# Altium PCB Elreg_Sender.PcbDoc (part 1 of 2)
Units mil, origin at the board's own origin, x right, y up, seen from the top; angles counter-clockwise.
Board outline 5250 x 7100 mil, 4 copper layers (Top Layer, Internal Plane 1, Internal Plane 2, Bottom Layer), stack 61.634 mil thick; 174 components, 129 nets, 539 pads, 126 vias.
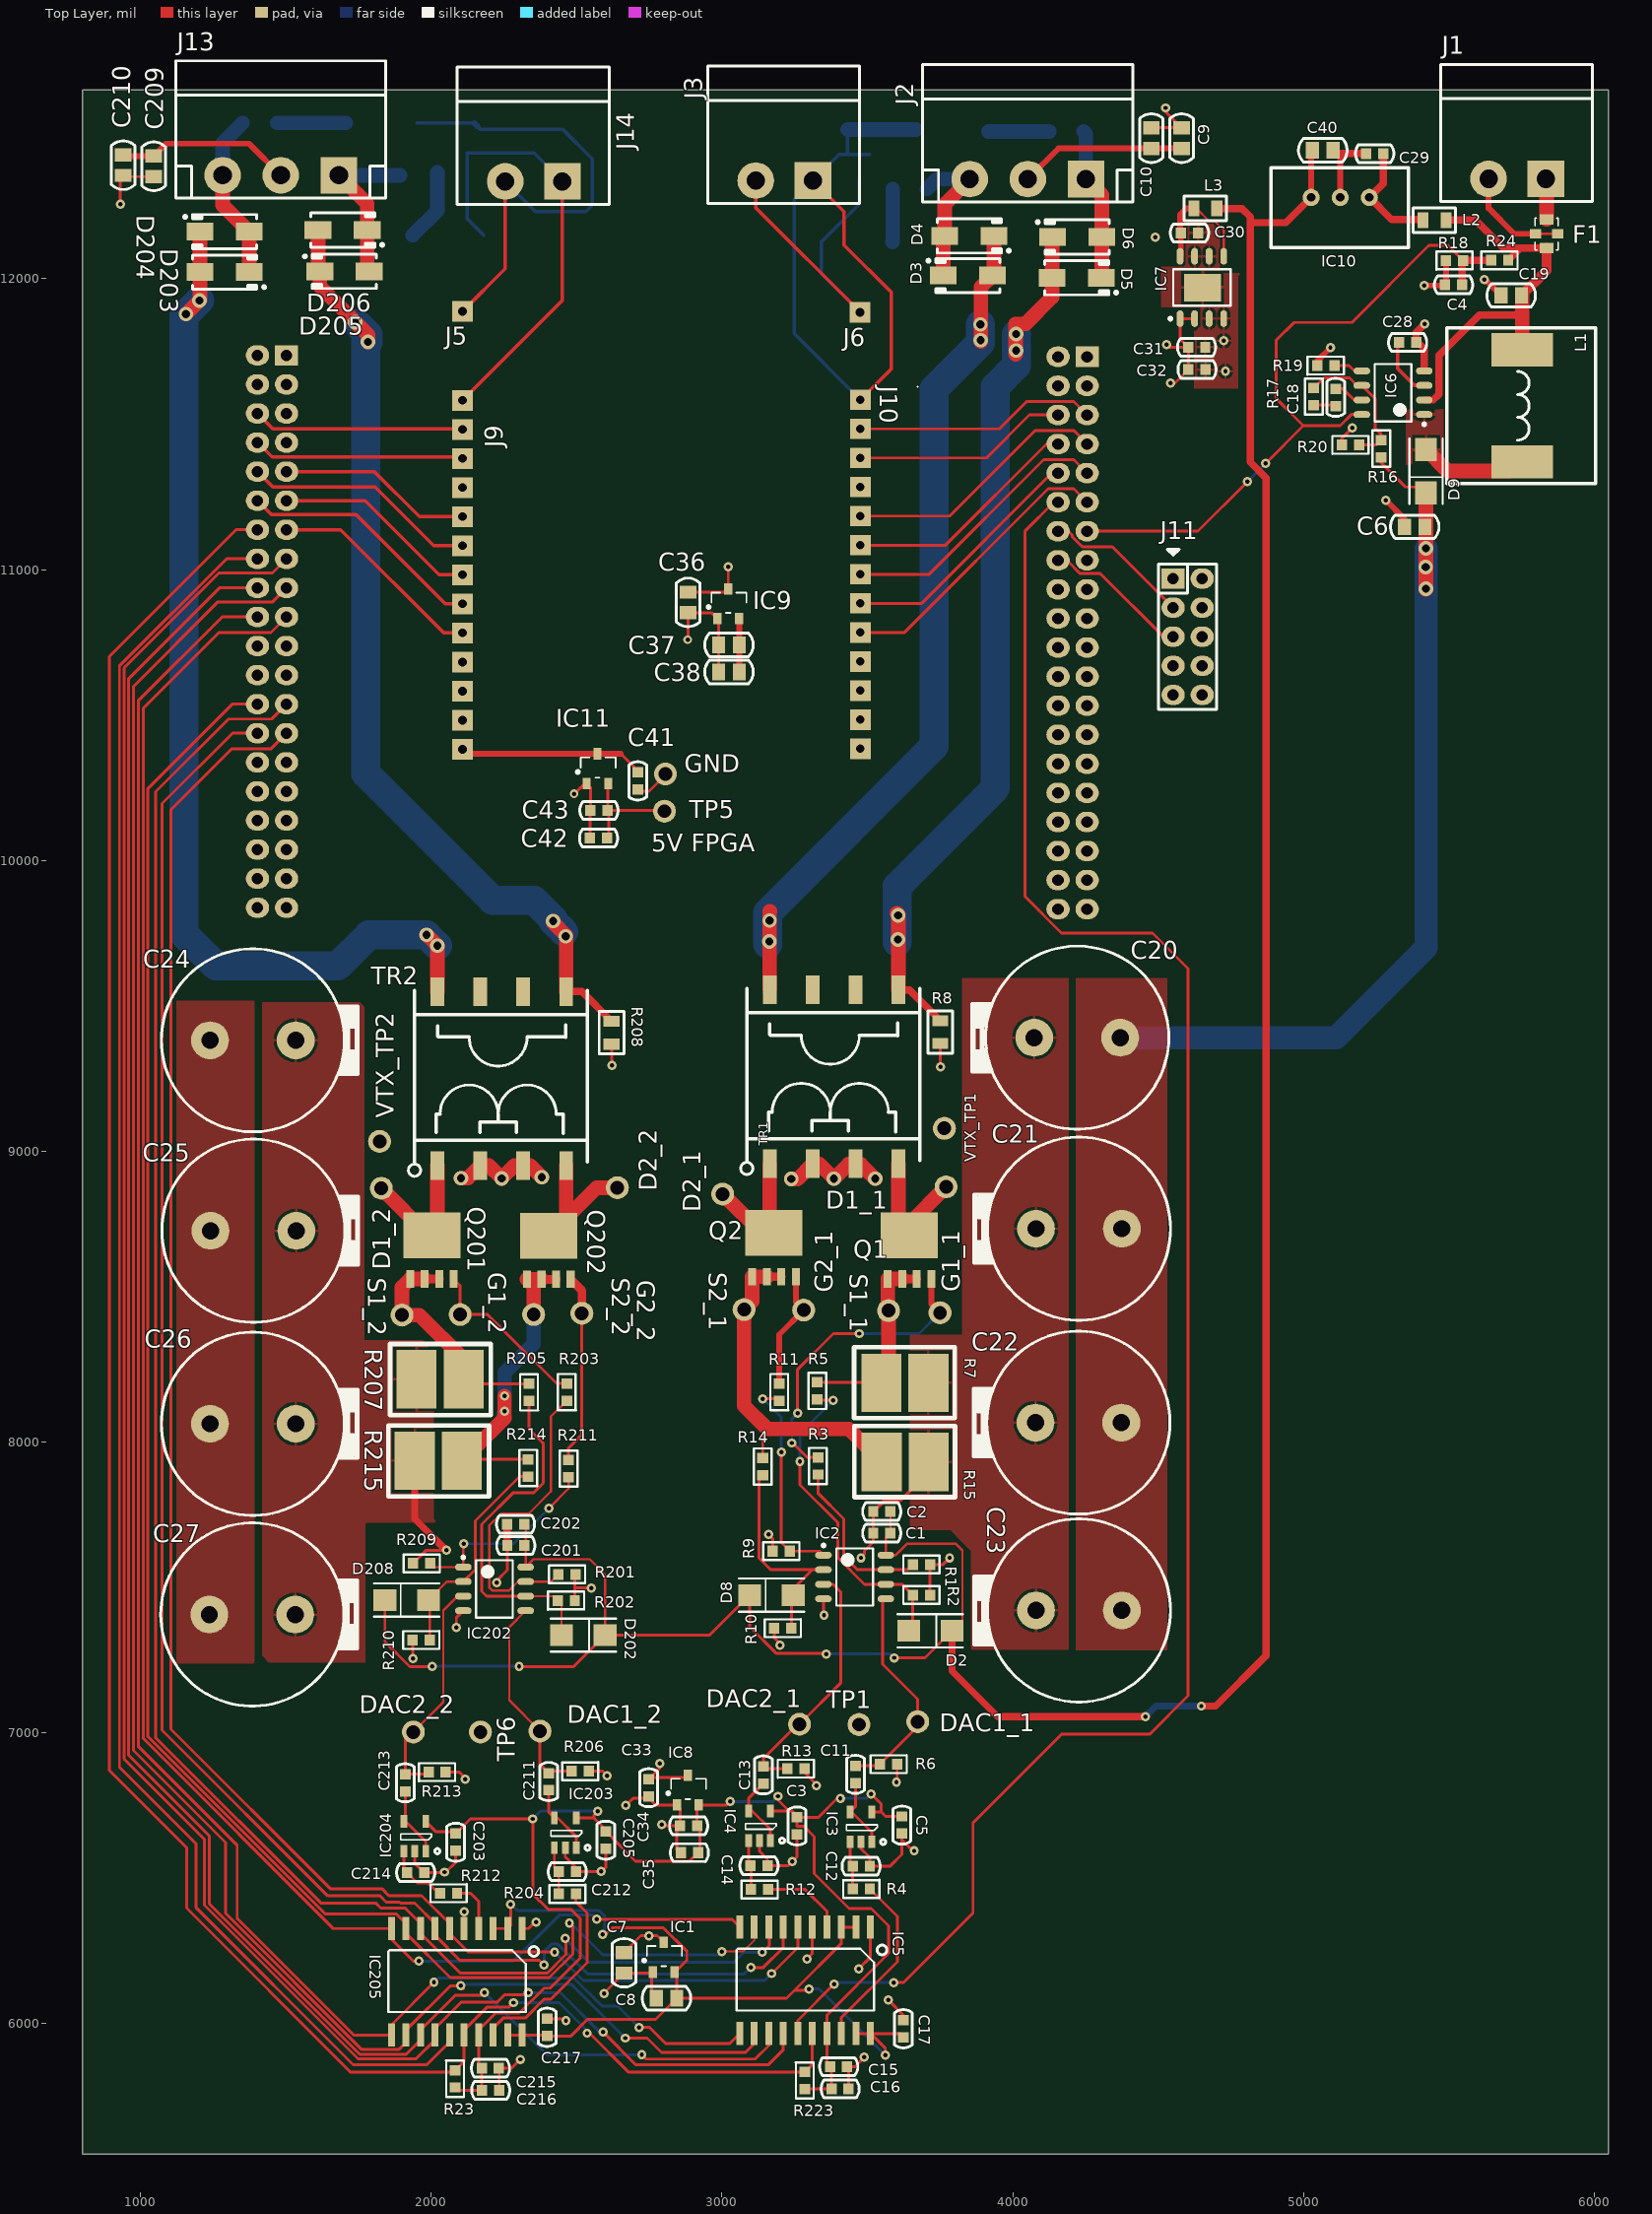
[diagram p0: Top Layer view]
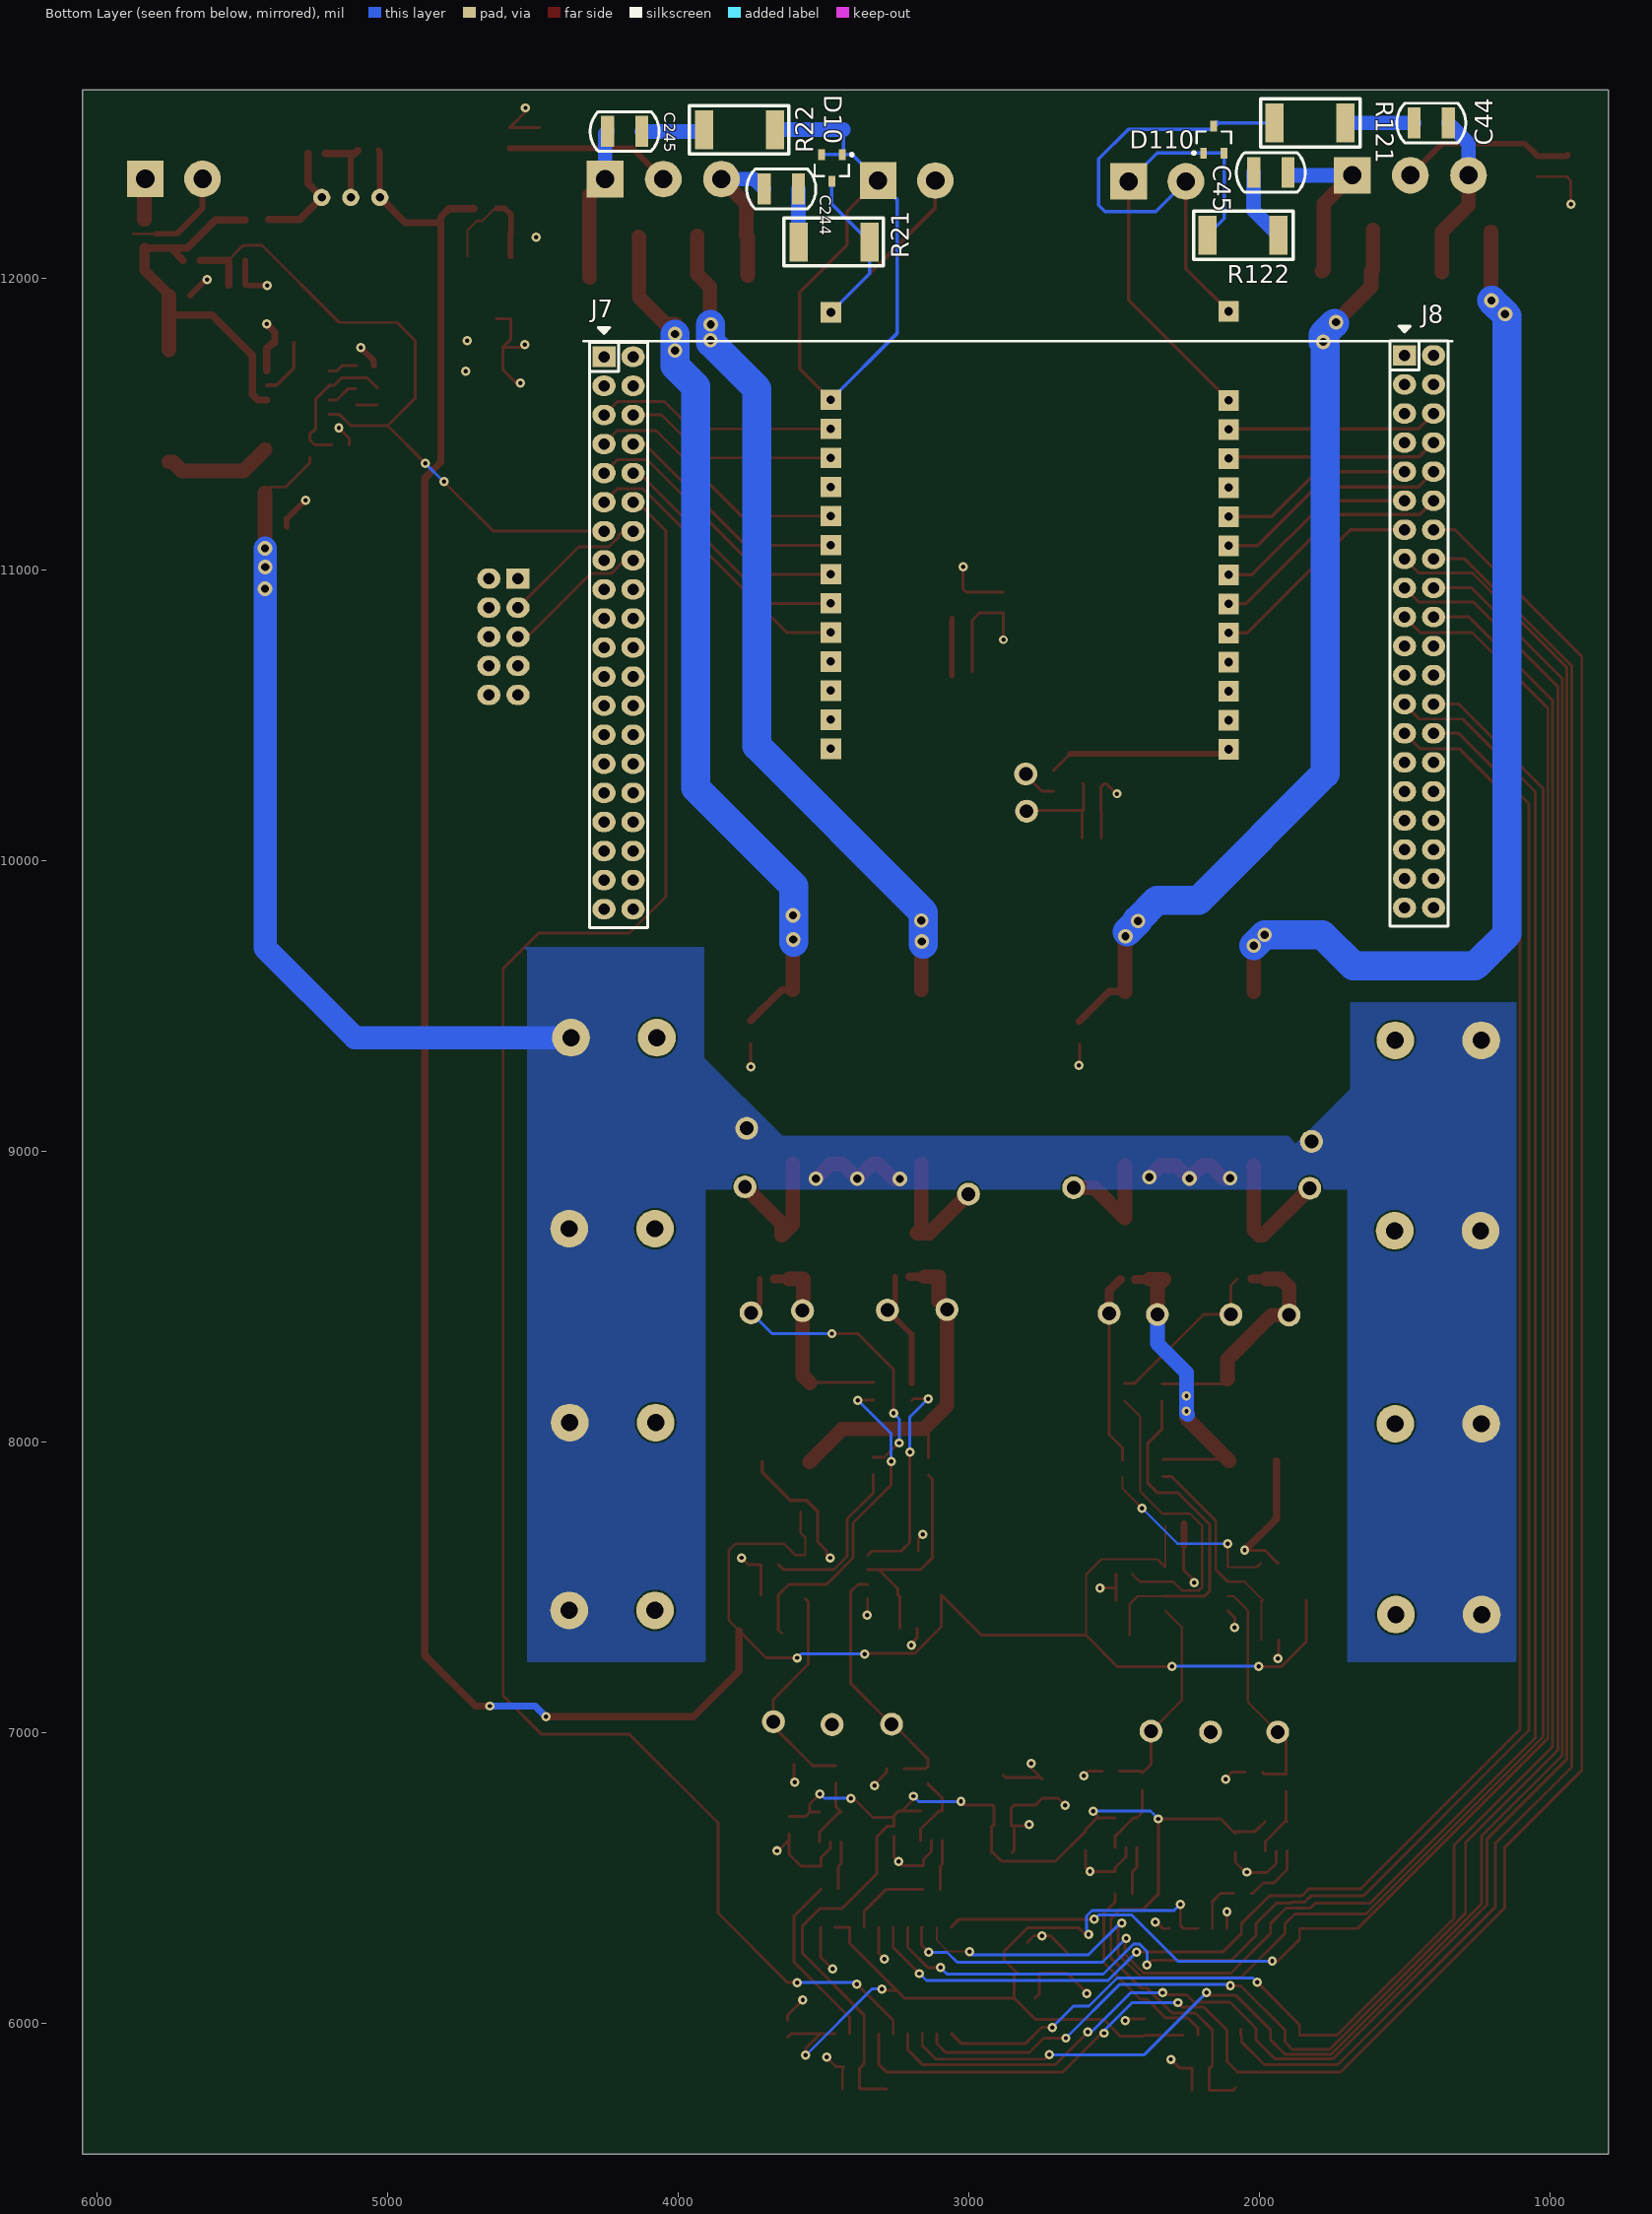
[diagram p1: Bottom Layer view, seen from below]
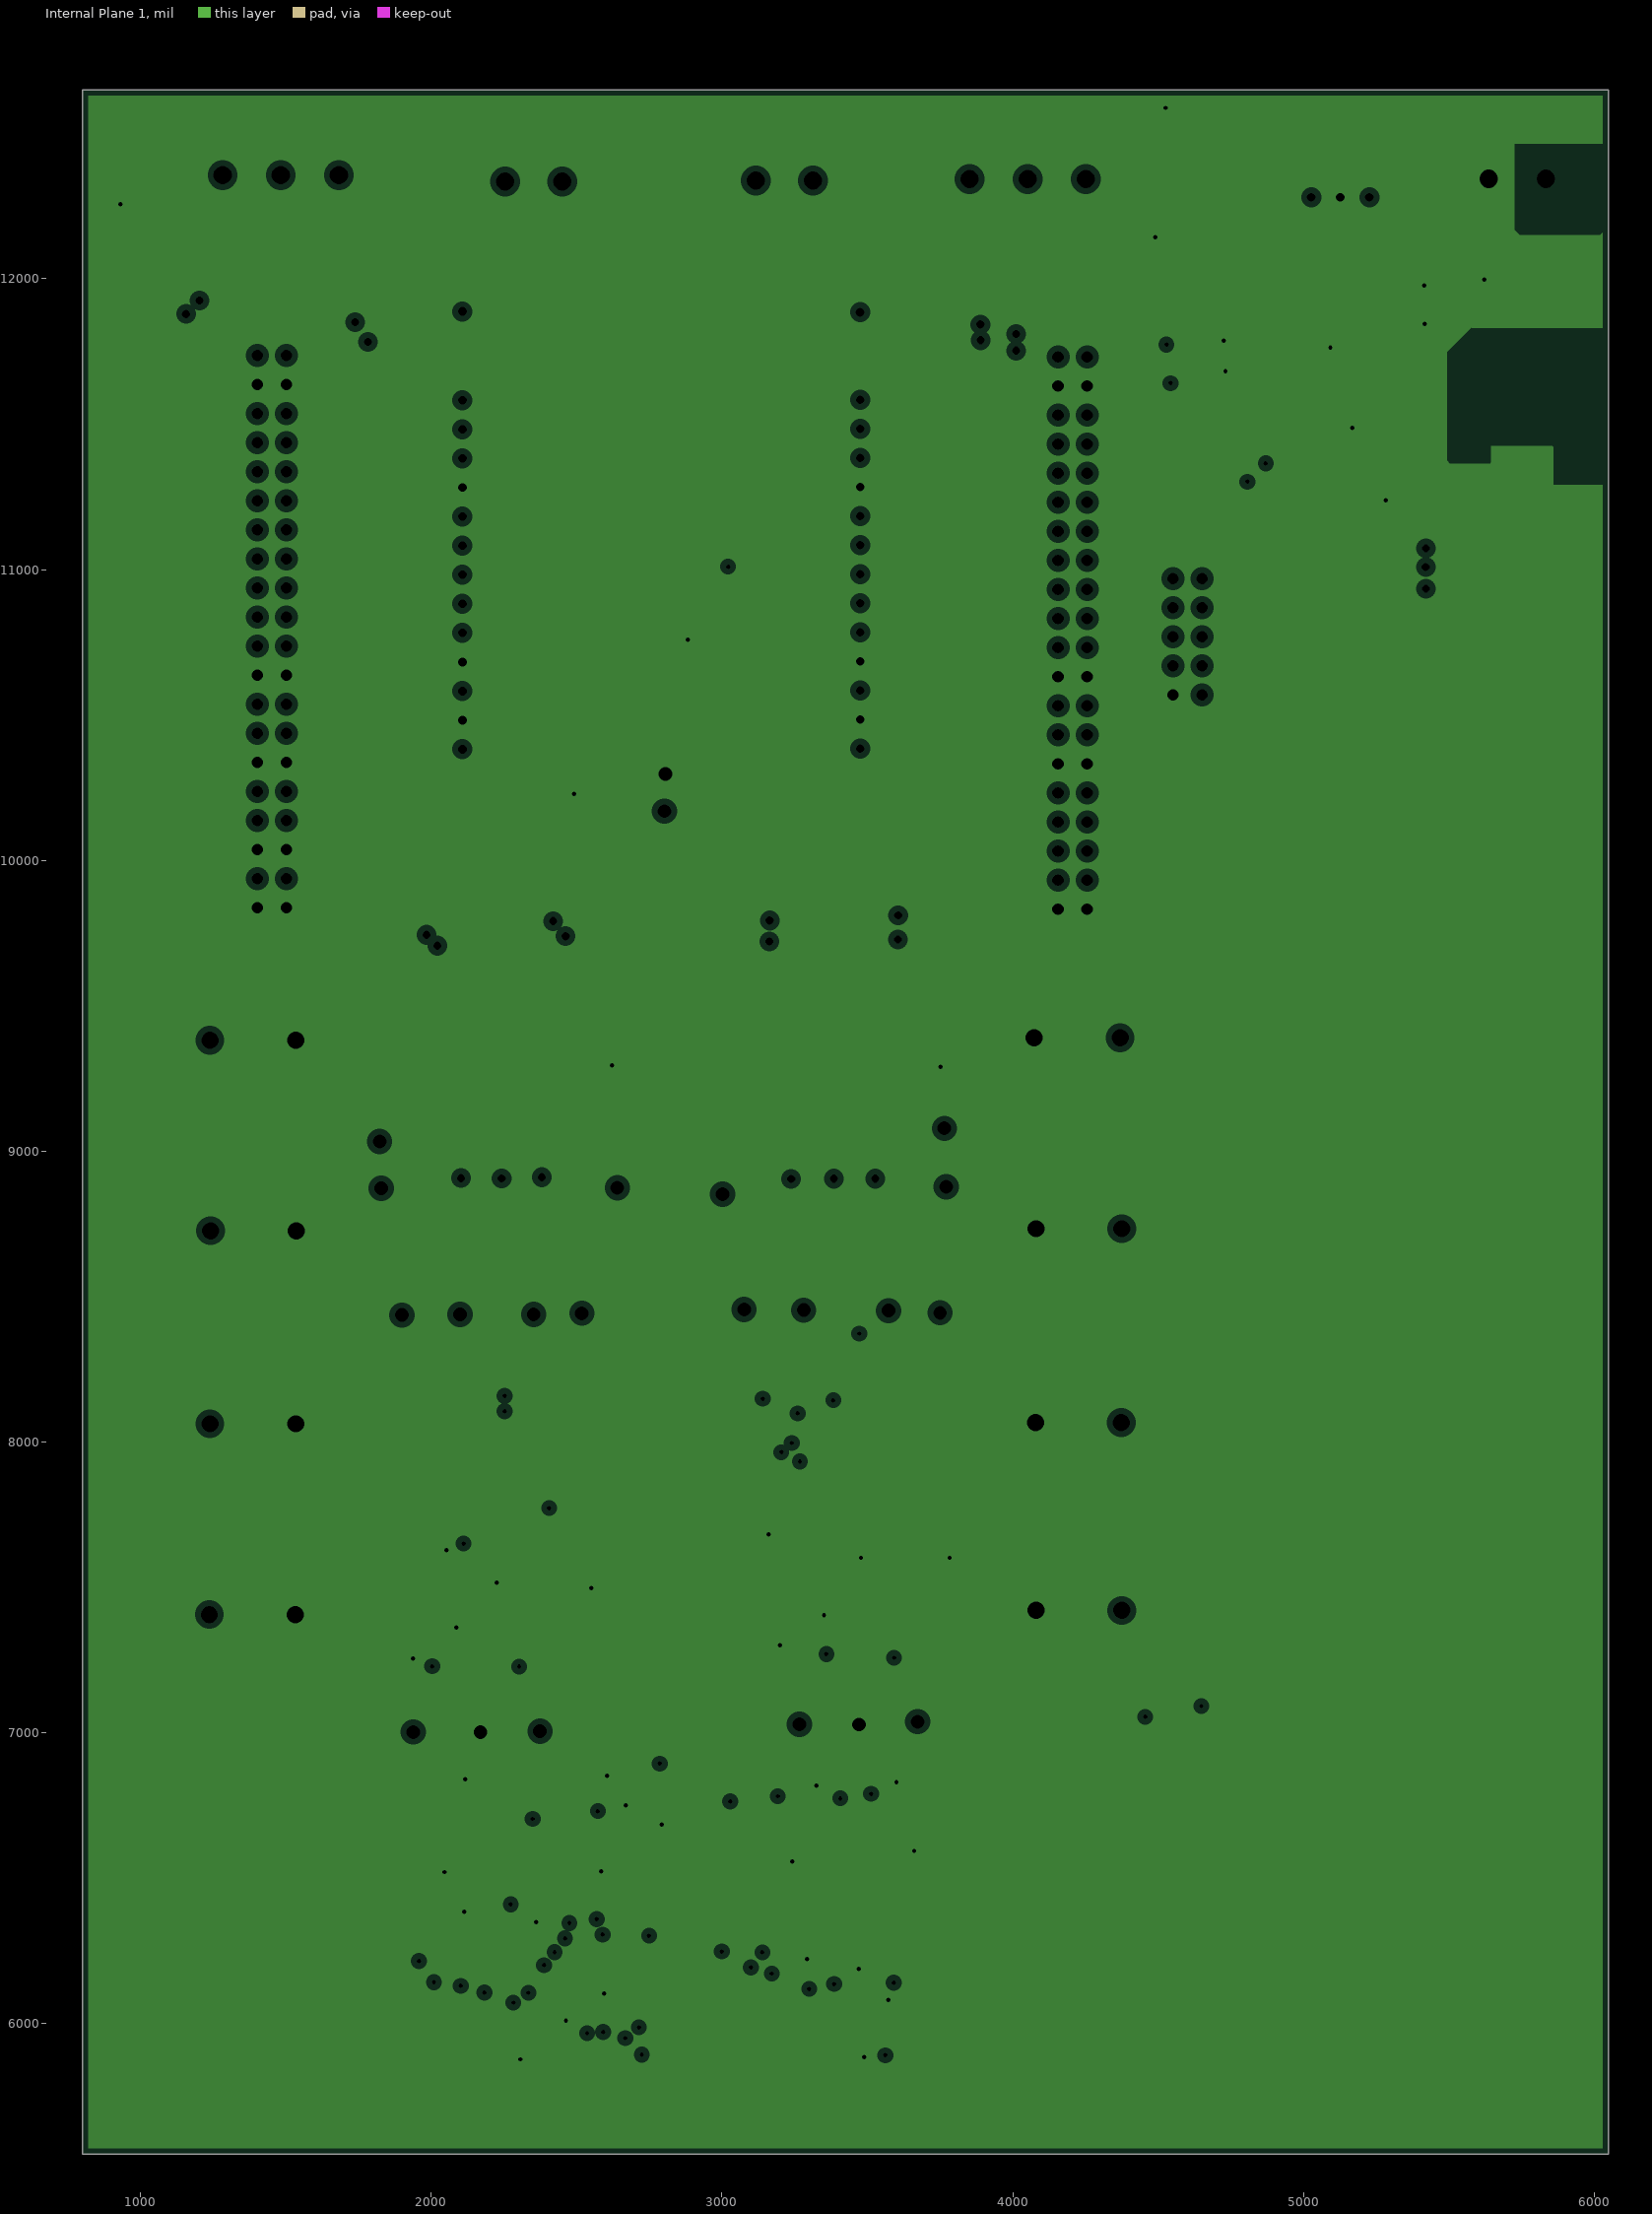
[diagram p2: Internal Plane 1, clearances drawn from the general rule]
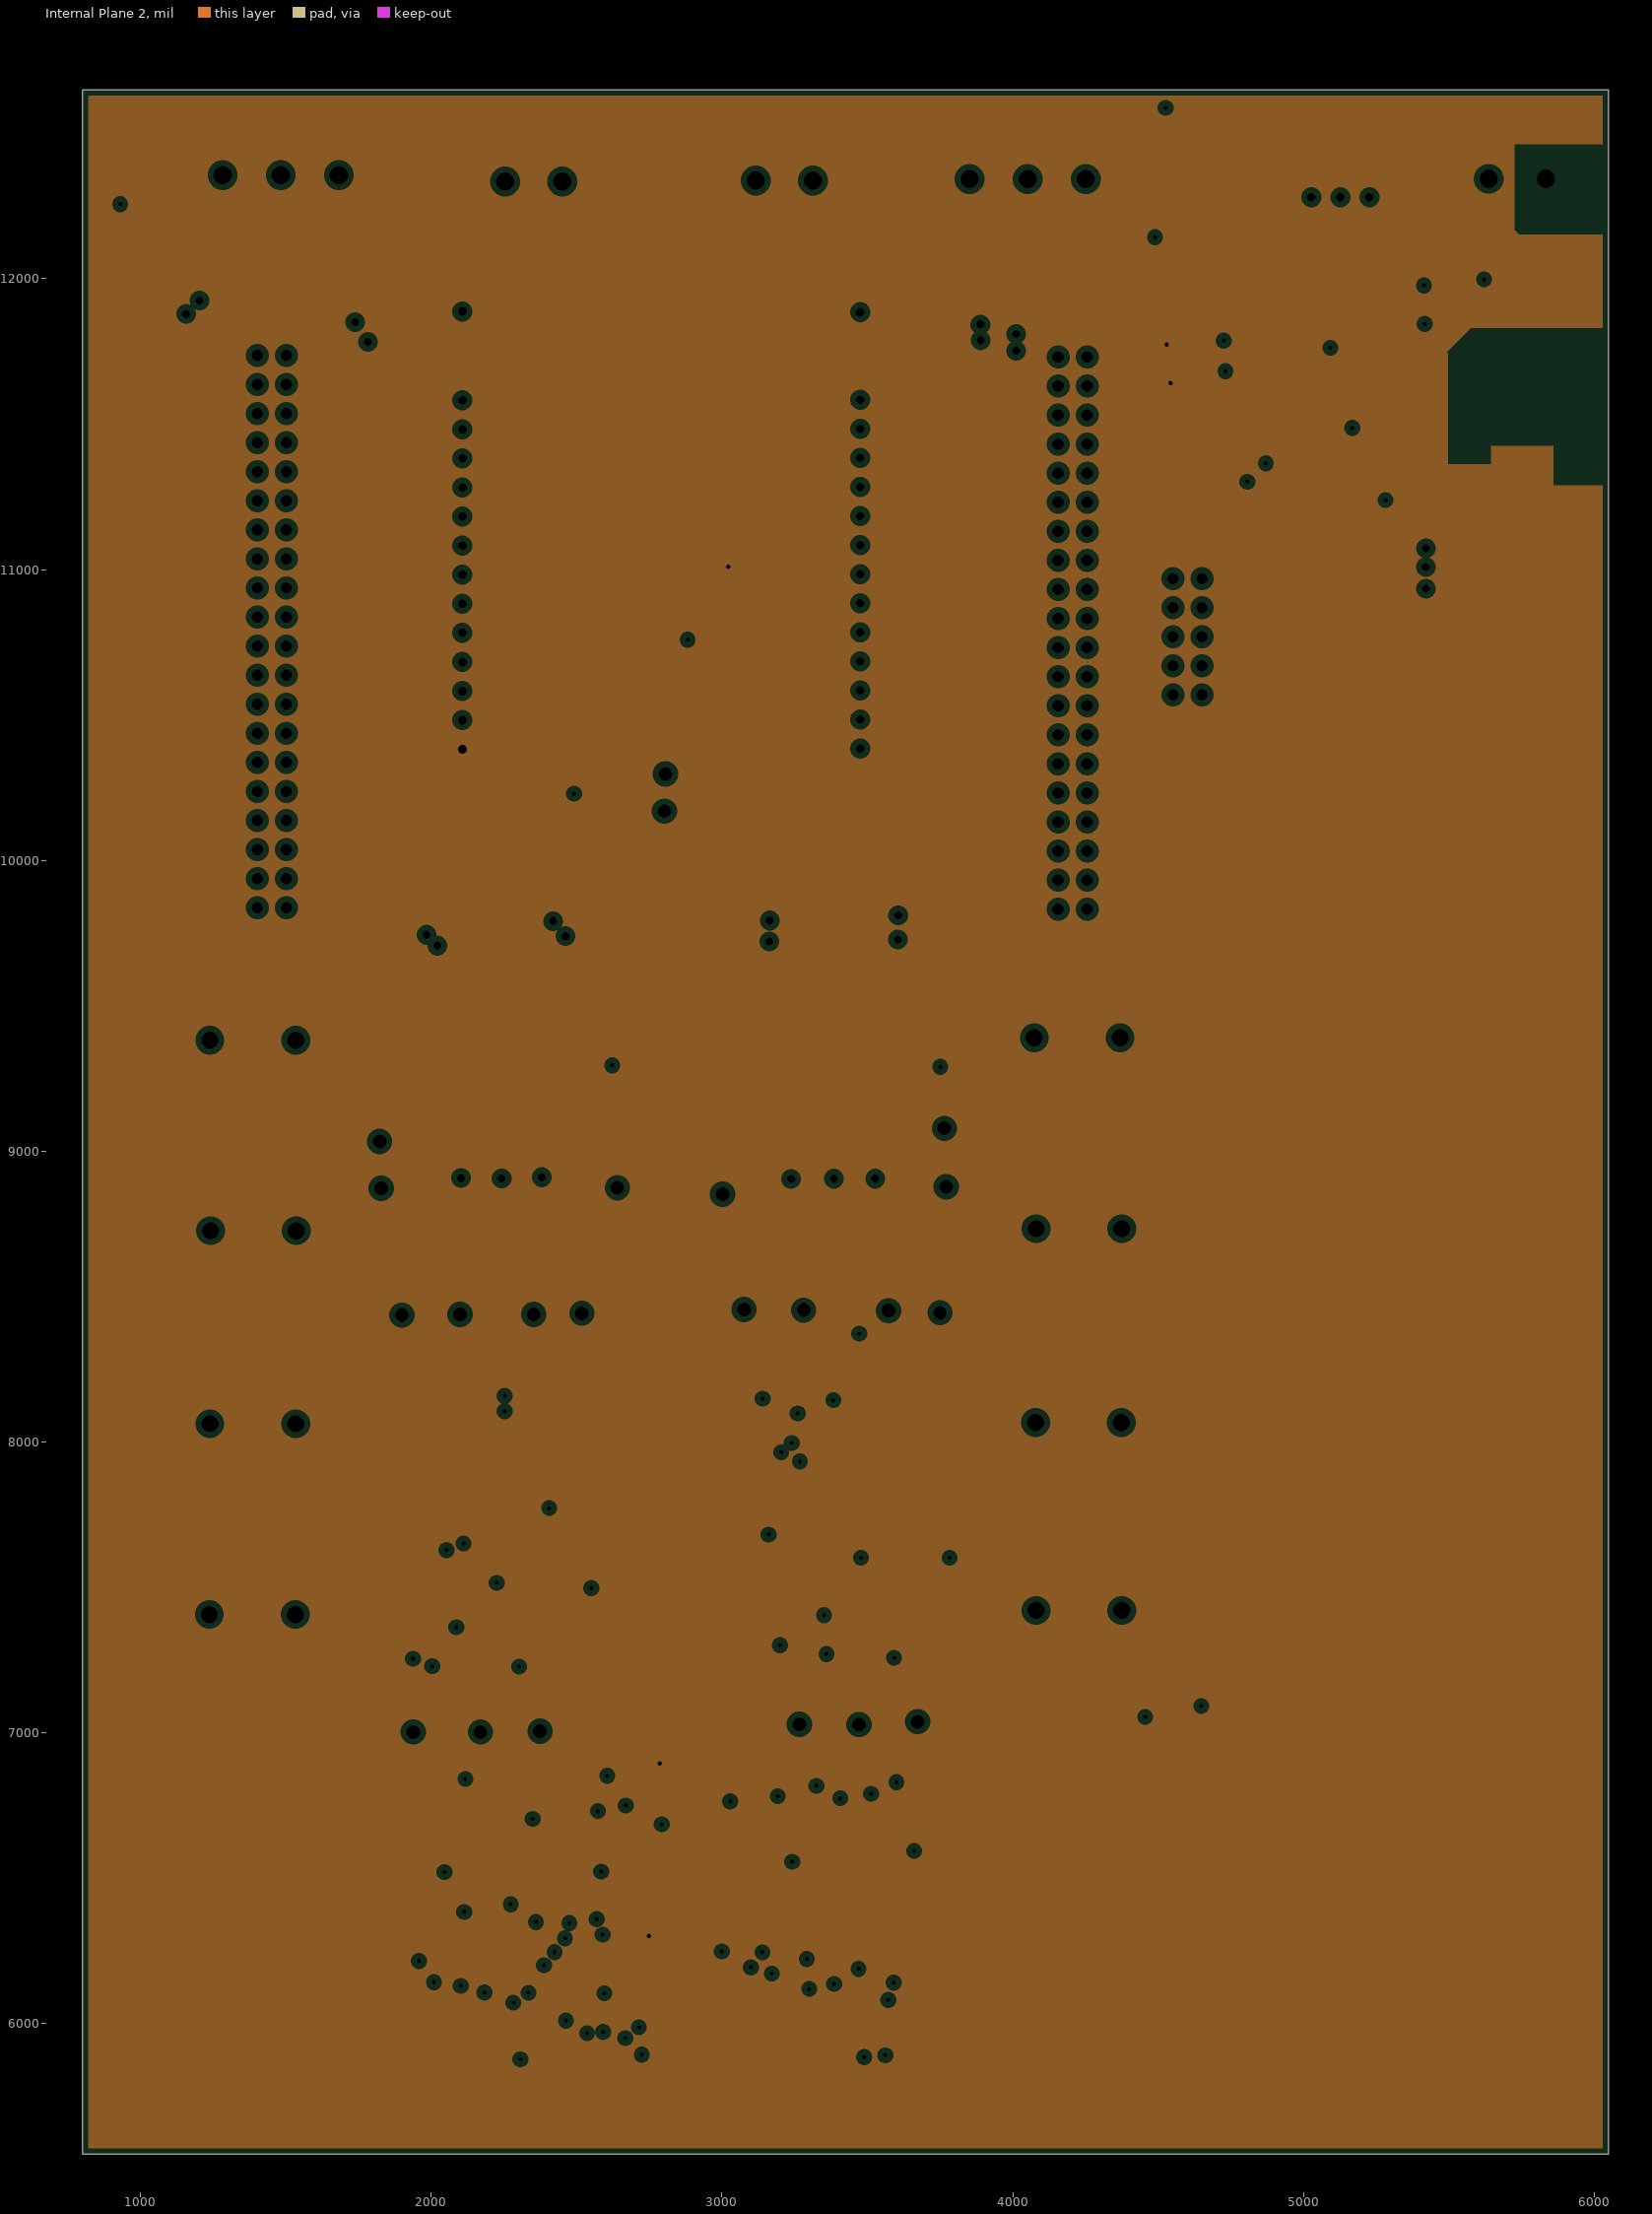
[diagram p3: Internal Plane 2, clearances drawn from the general rule]
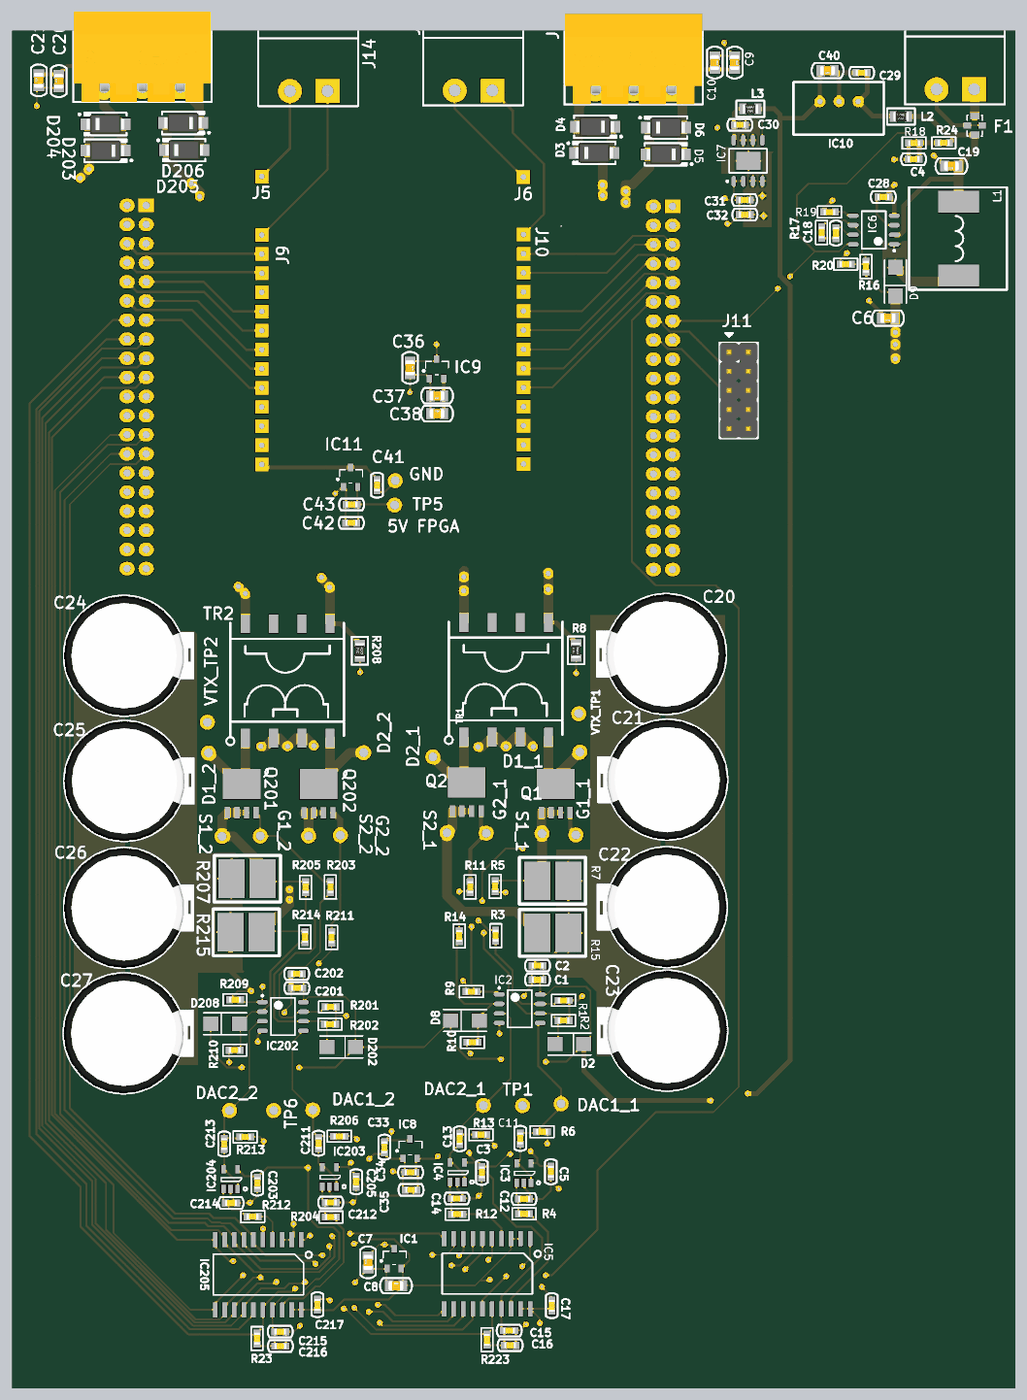
[diagram p5: 3D render of the assembled board from above, using the file's embedded part models]

## Layer stack, top to bottom
Top Solder: solder mask 0.9, Solder Resist, Dk 3.5
Top Layer: signal copper 1.4
Dielectric 1: core 25, FR-4, Dk 4.2
Internal Plane 1: plane copper 1.417, net GND
Dielectric 3: prepreg 6, Dk 4.2
Internal Plane 2: plane copper 1.417, net +6V5
Dielectric 2: core 25, Dk 4.2
Bottom Layer: signal copper 1.4
Bottom Solder: solder mask 0.9, Solder Resist, Dk 3.5

## Board outline
800,5550 6050,5550 6050,12650 800,12650

## Design rules (kind name [scope] priority, off if disabled: settings)
Clearance Clearance_2 [InPolygon vs InPolygon] p1: gap=10
Clearance [All] p2: gap=6
ComponentClearance [All] p1: gap=0 collisioncheckmode=3 verticalgap=0 showdistances=FALSE
FanoutControl Fanout_BGA [IsBGA] p1 off: bgadir=Out bgaviamode=Centered fanoutstyle=Auto fanoutdirection=Alternating viagrid=1 // Fanout_BGA (Default Rule)
FanoutControl Fanout_LCC [IsLCC] p2 off: bgadir=Out bgaviamode=Centered fanoutstyle=Auto fanoutdirection=Alternating viagrid=1 // Fanout_LCC (Default Rule)
FanoutControl Fanout_SOIC [IsSOIC] p3 off: bgadir=Out bgaviamode=Centered fanoutstyle=Auto fanoutdirection=Alternating viagrid=1 // Fanout_SOIC (Default Rule)
FanoutControl Fanout_Small [(CompPinCount < 5)] p4 off: bgadir=Out bgaviamode=Centered fanoutstyle=Auto fanoutdirection=OutThenIn viagrid=1 // Fanout_Small (Default Rule)
MinimumSolderMaskSliver [All] p1: minsoldermaskwidth=6
PlaneClearance [All] p1: clearance=20
PlaneConnect [All] p1: planeconnectstyle=Relief reliefexpansion=20 reliefentries=4 reliefconductorwidth=10 reliefairgap=10
PolygonConnect PolygonConnect_1 [InNet('VTX') vs InNet('VTX')] p1: connectstyle=Direct reliefconductorwidth=10 reliefentries=4 polygonreliefangle="90 Angle" airgapwidth=10
PolygonConnect [not InNet('VTX') vs not InNet('VTX')] p2: connectstyle=Relief reliefconductorwidth=10 reliefentries=4 polygonreliefangle="90 Angle" airgapwidth=10
RoomDefinition "Transmit CH2" [InComponentClass('Transmit CH2')] p1: confinementstyle=ConfineOut formatcopy=TRUE lockcomponents=FALSE outline 3071,4070 4630,4070 4630,4409 3071,4409
RoomDefinition "Transmit CH1" [InComponentClass('Transmit CH1')] p2: confinementstyle=ConfineOut formatcopy=TRUE lockcomponents=FALSE outline 0,0 2000,0 2000,1000 0,1000
RoomDefinition Elreg_Sender_Top [InComponentClass('Elreg_Sender_Top')] p3: confinementstyle=ConfineOut formatcopy=TRUE lockcomponents=FALSE outline 6010,1839 10368,1839 10368,4023 6010,4023
RoomDefinition "Power Circuit" [InComponentClass('Power Circuit')] p4: confinementstyle=ConfineOut formatcopy=TRUE lockcomponents=FALSE outline 0,0 2000,0 2000,1000 0,1000
RoutingVias [All] p1: holewidth=15 width=32.01 viastyle="Through Hole" minholewidth=15 minwidth=24.02 maxholewidth=70.39 maxwidth=120
SilkToBoardRegionClearance [All] p1 off:
SilkToSilkClearance [All] p1: silktosilkclearance=0
SilkToSolderMaskClearance [IsPad] p1: minsilkscreentomaskgap=3.94 clearancetoexposedcopper=TRUE
SolderMaskExpansion [All] p1: expansion=4
UnpouredPolygon [All] p1: allowunpoured=FALSE
Width [All] p1: maxlimit=150 minlimit=6 preferedwidth=6
18 further rules are at their usual default settings.

## Classes and differential pairs
component class "Power Circuit": C4 C6 C18 C19 C20 C21 C22 C23 C24 C25 C26 C27 C28 C29 C30 C31 C32 C33 C34 C35 C36 C37 C38 C40 C41 C42 C43 D9 F1 IC6 IC7 IC8 IC9 IC10 IC11 L1 L2 L3 R16 R17 R18 R19 R20 R24 TP5
component class "Transmit CH1": C1 C2 C3 C5 C7 C8 C9 C10 C11 C12 C13 C14 C15 C16 C17 D1_1 D2 D2_1 D3 D4 D5 D6 D7 D8 DAC1 DAC1_1 DAC2_1 G1_1 G2_1 GND IC1 IC2 IC3 IC4 IC5 Q1 Q2 R1 R2 R3 R4 R5 R6 R7 R8 R9 R10 R11 R12 R13 R14 R15 R23 S1_1 S2_1 TP1 TR1 VTX_TP1
component class Elreg_Sender_Top: C44 C45 C244 C245 D10 D110 J1 J2 J3 J5 J6 J7 J8 J9 J10 J11 J13 J14 R21 R22 R121 R122
component class "Transmit CH2": C201 C202 C203 C205 C209 C210 C211 C212 C213 C214 C215 C216 C217 D1_2 D2_2 D202 D203 D204 D205 D206 D208 DAC1_2 DAC2_2 G1_2 G2_2 IC202 IC203 IC204 IC205 Q201 Q202 R201 R202 R203 R204 R205 R206 R207 R208 R209 R210 R211 R212 R213 R214 R215 R223 S1_2 S2_2 TP6 TR2 VTX_TP2

## Components (designator, comment, footprint, x,y, rotation, side; value= is the part's Value field where it differs from the comment)
C1 "0.1uF 0805 20V" C-0603 3550,7686 r0 top
C2 "1uF 0805 20V" C-0603 3550,7760 r0 top
C3 "0.1uF" C-0603 3258,6679 r90 top
C4 "100nF" C-0603 5517,11979 r0 top
C5 "0.1uF" C-0603 3619,6682 r90 top
C6 "100uF" C-0805 5383,11147 r180 top
C7 "3.3uF" C-0805 2663,6208 r90 top
C8 "3.3uF" C-0805 2809,6086 r0 top
C9 "C-0805" C-0805 4581,12484 r270 top
C10 "C-0805" C-0805 4477,12484 r270 top
C11 "0.1uF" C-0603 3459,6856 r270 top
C12 "470pF" C-0603 3479,6540 r0 top
C13 "0.1uF" C-0603 3142,6854 r270 top
C14 "470pF" C-0603 3127,6542 r180 top
C15 "0.1uF 0805 10V" C-0603 3401,5851 r180 top
C16 "1uF 0805 10V" C-0603 3406,5774 r180 top
C17 "0.1uF 0805 10V" C-0603 3624,5981 r270 top
C18 "C-0805_10uF" C-0603 5111,11592 r270 top
C19 "10uF" C-0805 5715,11943 r180 top
C20 "35V2200u" CAP_16X25 4222,9390 r180 top
C21 "35V2200u" CAP_16X25 4228,8733 r180 top
C22 "35V2200u" CAP_16X25 4226,8066 r180 top
C23 "35V2200u" CAP_16X25 4228,7420 r180 top
C24 "35V2200u" CAP_16X25 1386,9381 r0 top
C25 "35V2200u" CAP_16X25 1388,8726 r0 top
C26 "35V2200u" CAP_16X25 1386,8062 r0 top
C27 "35V2200u" CAP_16X25 1384,7406 r0 top
C28 "C-0805_10uF" C-0603 5359,11781 r0 top
C29 "47uF" C-0603 5245,12431 r180 top
C30 "47uF" C-0603 4608,12158 r180 top
C31 "10uF" C-0603 4633,11765 r0 top
C32 "100nF" C-0603 4634,11688 r180 top
C33 "C-0805_10uF" C-0603 2748,6810 r270 top
C34 "10uF" C-0603 2885,6679 r180 top
C35 "100nF" C-0603 2888,6587 r0 top
C36 "C-0805_10uF" C-0805 2883,10887 r270 top
C37 "C-0805_10uF" C-0805 3024,10741 r180 top
C38 "C-0805_100nF" C-0805 3024,10648 r0 top
C40 "100nF" C-0805 5067,12442 r180 top
C41 "10uF" C-0603 2710,10273 r270 top
C42 "10uF" C-0603 2575,10076 r180 top
C43 "100nF" C-0603 2577,10172 r0 top
C44 "2n2" CAP-1210 1410,12536 r0 bottom
C45 "2n2" CAP-1210 1962,12366 r0 bottom
C201 "0.1uF 0805 20V" C-0603 2291,7643 r0 top
C202 "1uF 0805 20V" C-0603 2290,7717 r0 top
C203 "0.1uF" C-0603 2084,6623 r90 top
C205 "0.1uF" C-0603 2600,6630 r90 top
C209 "C-0805" C-0805 1045,12387 r90 top
C210 "C-0805" C-0805 940,12391 r90 top
C211 "0.1uF" C-0603 2404,6831 r270 top
C212 "470pF" C-0603 2468,6521 r0 top
C213 "0.1uF" C-0603 1910,6827 r270 top
C214 "470pF" C-0603 1946,6518 r180 top
C215 "0.1uF 0805 10V" C-0603 2203,5845 r180 top
C216 "1uF 0805 10V" C-0603 2204,5770 r180 top
C217 "0.1uF 0805 10V" C-0603 2398,5986 r270 top
C244 "2n2" CAP-1210 3646,12309 r180 bottom
C245 "2n2" CAP-1210 4185,12507 r180 bottom
D1_1 "Test_Point" Test_Point#1 3771,8877 r0 top
D1_2 "Test_Point" Test_Point#1 1828,8872 r0 top
D2 "Zener 12V" DFN380P520X45-2N 3642,7350 r180 top
D2_1 "Test_Point" Test_Point#1 3002,8852 r0 top
D2_2 "Test_Point" Test_Point#1 2640,8874 r0 top
D3 "ES1D" SMA 3846,12011 r180 top
D4 "ES1D" SMA 3851,12148 r0 top
D5 "ES1D" SMA 4220,12004 r0 top
D6 "ES1D" SMA 4222,12144 r180 top
D8 "Zener 12V" DFN380P520X45-2N 3245,7473 r0 top
D9 "DIODE SCHOTTKY 40V 1A DO214AC" DFN380P520X45-2N 5422,11413 r90 top
D10 "BAV199" BAV199 3472,12381 r270 bottom
D110 "BAV199" BAV199 2158,12479 r90 bottom
D202 "Zener 12V" DFN380P520X45-2N 2448,7335 r180 top
D203 "ES1D" SMA 1289,12023 r0 top
D204 "ES1D" SMA 1289,12162 r180 top
D205 "ES1D" SMA 1701,12026 r180 top
D206 "ES1D" SMA 1695,12168 r0 top
D208 "Zener 12V" DFN380P520X45-2N 1990,7456 r0 top
DAC1_1 "DAC1" Test_Point#2 3680,7051 r270 top
DAC1_2 "DAC2_2" Test_Point#1 2374,7005 r90 top
DAC2_1 "DAC2_1" Test_Point#3 3250,7036 r270 top
DAC2_2 "DAC2_2" Test_Point#1 1938,7002 r0 top
F1 "SBSPP0500683MX" Filter_SBSPP0500 5837,12204 r270 top
G1_1 "Test_Point" Test_Point#1 3750,8444 r0 top
G1_2 "Test_Point" Test_Point#1 2099,8438 r0 top
G2_1 "Test_Point" Test_Point#1 3281,8453 r0 top
G2_2 "Test_Point" Test_Point#1 2518,8442 r0 top
IC1 "AP2210N-3.3 or  MCP1811AT-012/TTCT-ND" SOT23-3 2762,6176 r90 top
IC2 "AD823AARZ-ND" SOIC-8 3349,7610 r0 top
IC3 "LMV116MF" SOT-23-5 3515,6624 r270 top
IC4 "LMV116MF" SOT-23-5 3167,6628 r270 top
IC5 "TLC7528EDW" SOIC-20 3511,6331 r270 top
IC6 "LM5002" SOIC127P600X205-8N 5415.75,11533.22 r180 top
IC7 "BD70GA5WEFJ-E2" HTSOP-J8 4576,11863 r90 top
IC8 "AP2210N-5.0" SOT23-3 2845,6751 r90 top
IC9 "AP2210N-3.3" SOT23-3 2984,10831 r90 top
IC10 "VX78012-500" VREG 5227,12280 r180 top
IC11 "AP2210N-5.0" SOT23-3 2534,10264 r90 top
IC202 "AD823AARZ-ND" SOIC-8 2110,7569 r0 top
IC203 "LMV116MF" SOT-23-5 2498,6604 r270 top
IC204 "LMV116MF" SOT-23-5 1981,6592 r270 top
IC205 "TLC7528EDW" SOIC-20 2313,6326 r270 top
J1 "24V IN" WAGO_2_pins 5834,12344 r180 top
J2 "CONN 3x1" WAGO-3_pins 4052,12343 r180 top
J3 "CH2 Receive" WAGO_2_pins 3313,12338 r180 top
J5 "CON1_b" "CONN1 _B"#1 2105,11888 r0 top
J6 "CON1_b" "CONN1 _B"#2 3470,11885 r0 top
J7 "Header 2X20" HEADER_2x20_2_54_1mm 4206,11532 r270 bottom
J8 "Header 2X20" HEADER_2x20_2_54_1mm 1452,11537 r270 bottom
J9 "CON13" CONN13 2107,11582 r0 top
J10 "CON14" CONN13 3476,11584 r0 top
J11 "Header 2X5" PIN-2X5-2.54-1.0 4602,10769 r270 top
J13 "CONN 3x1" WAGO-3_pins 1482,12356 r180 top
J14 "CH1 Receive" WAGO_2_pins 2451,12335 r180 top
L1 "330UH 1.15A" IND 5753,11756 r270 top
L2 "1uH 0805" 0805 5451,12202 r180 top
L3 "1uH 0805" 0805 4663,12242 r180 top
Q1 "BUK7Y9R9" BUK7Y9R) 3570,8560 r0 top
Q2 "BUK7Y9R9" BUK7Y9R) 3104,8568 r0 top
Q201 "BUK7Y9R9" BUK7Y9R) 1927,8560 r0 top
Q202 "BUK7Y9R9" BUK7Y9R) 2329,8559 r0 top
R1 "15k  NM" R-0603 3686,7578 r180 top
R2 "4k1  NM" R-0603 3686,7473 r0 top
R3 "0.5R" R-0603 3330,7917 r90 top
R4 "470R" R-0603 3479,6462 r180 top
R5 "0  0805" R-0603 3328,8175 r90 top
R6 "47k" R-0603 3573,6891 r180 top
R7 "0.1  2818" RES2818 3548,8203 r0 top
R8 "0R NM" RES-0805 3751,9409 r90 top
R9 "15k  NM" R-0603 3204,7624 r0 top
R10 "4k1  NM" R-0603 3209,7359 r180 top
R11 "0.5R" R-0603 3197,8171 r90 top
R12 "470R" R-0603 3129,6460 r180 top
R13 "47k" R-0603 3254,6876 r0 top
R14 "0  0805" R-0603 3140,7915 r90 top
R15 "0.1  2818" RES2818 3549,7931 r0 top
R16 "54.9k  0805" R-0603 5268,11416 r270 top
R17 "73.2k  0805" R-0603 5036,11595 r90 top
R18 "6k04" R-0603 5520,12063 r0 top
R19 "52.3k  0805" R-0603 5077,11702 r0 top
R20 "1.47k  0805" R-0603 5162,11429 r0 top
R21 "2K 2W" RES2512 3342,12127 r0 bottom
R22 "2K 2W" RES2512 3667,12513 r0 bottom
R23 "47k" R-0603 2082,5809 r270 top
R24 "60k4" R-0603 5675,12064 r0 top
R121 "2K 2W" RES2512 1950,12536 r180 bottom
R122 "2K 2W" RES2512 2180,12150 r180 bottom
R201 "15k  NM" R-0603 2467,7544 r180 top
R202 "4k1  NM" R-0603 2464,7454 r0 top
R203 "0.5R" R-0603 2466,8171 r90 top
R204 "470R" R-0603 2468,6445 r180 top
R205 "0  R" R-0603 2336,8170 r90 top
R206 "47k" R-0603 2512,6867 r180 top
R207 "0.1  2818" RES2818 2111,8215 r180 top
R208 "0R NM" RES-0805 2620,9407 r90 top
R209 "15k  NM" R-0603 1967,7582 r0 top
R210 "4k1  NM" R-0603 1965,7318 r180 top
R211 "0.5R" R-0603 2472,7908 r90 top
R212 "470R" R-0603 2059,6447 r180 top
R213 "47k" R-0603 2020,6864 r0 top
R214 "0R" R-0603 2333,7910 r90 top
R215 "0.1  2818" RES2818 2105,7935 r180 top
R223 "47k" R-0603 3285,5803 r270 top
S1_1 "Test_Point" Test_Point#1 3573,8451 r0 top
S1_2 "Test_Point" Test_Point#1 1899,8436 r0 top
S2_1 "Test_Point" Test_Point#1 3076,8455 r0 top
S2_2 "Test_Point" Test_Point#1 2352,8438 r0 top
TP1 "GND" Test_Point#4 3488,7036 r270 top
TP5 "5V FPGA" Test_Point#1 2802,10169 r0 top
TP6 "GND" Test_Point#1 2169,7002 r0 top
TR1 "10:10:150" Trafo_15x15 3164,8956 r0 top
TR2 "10:10:150" Trafo_15x15 2021,8950 r0 top
VTX_TP1 "Test_Point" Test_Point#1 3765,9078 r90 top
VTX_TP2 "Test_Point" Test_Point#1 1822,9033 r90 top

## Footprints (in the part's own frame and the unit in brackets; to place one, negate y for a bottom-side part, rotate by r counter-clockwise, add the part's x,y. Pads: shape width x height; smd on the part's side, far side on the other; paste and mask are expansions set on the pad)
0805 [mm] "SMD, 0805"
  rect 0.95x1.4 smd: 1(-1,0) 2(1,0)
  silkscreen extent -1.85,-1.08 1.85,1.08, body extent -1,-0.62 1,0.63, height 0.45
BAV199 [mm] "SOT23, 3-Leads, Body 2.90x2.40mm, Pitch 0.90mm, IPC Medium Density"
  rect 0.95x0.6 smd: 1(-1.175,0.9) 2(-1.175,-0.9) 3(1.175,0)
  silkscreen extent -1.3,-1.5 0.7,1.87, body extent -0.7,-1.5 0.7,1.5, height 1
BUK7Y9R) [mm] "MOS FET"
  rect 0.7x1.524 smd: 1(3.81,0) 3(0,0) 3(1.27,0) 3(2.54,0)
  rect 5x4 smd: 2(1.9,3.81)
C-0603 [mm] "Capacitors 0603"
  rect 0.9x0.95 smd: 1(-0.75,0) 2(0.75,0)
  silkscreen extent -1.68,-0.78 1.66,0.77, body extent -0.8,-0.4 0.8,0.4, height 0.86
C-0805 [mm] "0805"
  rect 1.15x1.45 smd: 1(-0.9,0) 2(0.9,0)
  silkscreen extent -2.12,-1.02 2.12,1.02, body extent -1,-0.63 1,0.63, height 0.78
CAP-1210 [mm] "Capacitors, SMD, 1210"
  rect 1.15x2.7 smd: 1(-1.5,0) 2(1.5,0)
  silkscreen extent -3.01,-1.73 3.01,1.73, body extent -1.6,-1.25 1.6,1.25, height 1.3
CAP_16X25 [mil] "Polar Capacitors"
  round 130 hole 59.06: 1(-147.64,0) 2(147.64,0)
  silkscreen extent -315,-315 362,315, body extent -315,-315 313,315, height 985
"CONN1 _B"#1 [mm]
  rect 1.8x1.8 hole 0.75: 1(0.051,0)
"CONN1 _B"#2 [mm]
  rect 1.8x1.8 hole 0.75: 1(0.127,0)
CONN13 [mm]
  rect 1.8x1.8 hole 0.75: 1(0,0) 2(0,-2.54) 3(0,-5.08) 4(0,-7.62) 5(0,-10.16) 6(0,-12.7) 7(0,-15.24) 8(0,-17.78) 9(0,-20.32) 10(0,-22.86) 11(0,-25.4) 12(0,-27.94) 13(0,-30.48)
DFN380P520X45-2N [mm] "DFN, 2-Leads, Body 2.50x5.20mm, Pitch 3.80mm, IPC Medium Density"
  rect 2x1.9 smd: 1(0,0) 2(-3.8,0)
  silkscreen extent -4.75,-1.45 0.95,1.45, body extent -4.75,-1.45 0.95,1.45, height 0.45
Filter_SBSPP0500 [mm]
  rect 0.9x1.2 smd: 1(0,0) 3(2.5,0)
  rect 0.8x1 smd: 2(1.245,0.965) 2(1.245,-0.991)
  silkscreen extent -0.13,-1.02 2.67,1.02
HEADER_2x20_2_54_1mm [mil] "Pin Header"
  rect 70x80 hole 39.37: 1(-200,-50)
  oval 70x80 hole 39.37: 2(-200,50) 3(-100,-50) 4(-100,50) 5(0,-50) 6(0,50) 7(100,-50) 8(100,50) 9(200,-50) 10(200,50) 11(300,-50) 12(300,50) 13(400,-50) 14(400,50) 15(500,-50) 16(500,50) 17(600,-50) 18(600,50) 19(700,-50) 20(700,50) 21(800,-50) 22(800,50) 23(900,-50) 24(900,50) 25(1000,-50) 26(1000,50) 27(1100,-50) 28(1100,50) 29(1200,-50) 30(1200,50) 31(1300,-50) 32(1300,50) 33(1400,-50) 34(1400,50) 35(1500,-50) 36(1500,50) 37(1600,-50) 38(1600,50) 39(1700,-50) 40(1700,50)
  silkscreen extent -300,-100 1764,100, body extent -252,-102 1768,102, height 1000
HTSOP-J8 [mm] "TSOP, 8-Leads, Body 4.90x3.90mm, Pitch 1.27mm, IPC Medium Density"
  rect 2.4x3.2 smd: 0(2.718,-1.956)
  oval 1.45x0.6 smd: 1(0,0) 2(0,-1.27) 3(0,-2.54) 4(0,-3.81) 5(5.45,-3.81) 6(5.45,-2.54) 7(5.45,-1.27) 8(5.45,0)
  silkscreen extent -0.12,-4.41 4.33,0.97, body extent 0.72,-4.41 4.72,0.6, height 1.1
IND [mm]
  rect 2.9x5.4 smd: 1(0,0) 2(9.8,0)
  silkscreen extent -1.9,-6.6 11.7,6.4
PIN-2X5-2.54-1.0 [mil] "Pin Header"
  rect 70x80 hole 39.37: 1(-200,-50)
  oval 70x80 hole 39.37: 2(-200,50) 3(-100,-50) 4(-100,50) 5(0,-50) 6(0,50) 7(100,-50) 8(100,50) 9(200,-50) 10(200,50)
  silkscreen extent -300,-100 250,100, body extent -250,-100 250,100, height 398
R-0603 [mm] "Resistor  0603"
  rect 0.9x0.95 smd: 1(-0.75,0) 2(0.75,0)
  silkscreen extent -1.58,-0.79 1.57,0.77, body extent -0.8,-0.4 0.8,0.4, height 0.86
RES2512 [mm]
  rect 1.6x3.4 smd: 1(0,0) 2(6.2,0)
  silkscreen extent -1.2,-2.1 7.5,2.1
RES2818 [mm]
  rect 3.5x5.1 smd: 1(0,0) 2(4.118,0)
  silkscreen extent -2.38,-3.08 6.42,3.12
RES-0805 [mm] "SMD, 0805"
  rect 0.95x1.4 smd: 1(-1,0) 2(1,0)
  silkscreen extent -1.85,-1.08 1.85,1.08, body extent -1,-0.62 1,0.63, height 0.45
SMA [mm] "DO-214AC"
  rect 2.35x1.55 smd: 1(-2.15,0) 2(2.15,0)
  silkscreen extent -2.8,-1.5 3.58,1.5, body extent -2.6,-1.3 2.6,1.3, height 2.64
SOIC127P600X205-8N [mm] "SOIC, 8-Leads, Body 4.90x3.90mm, Pitch 1.27mm, IPC Medium Density"
  oval 1.45x0.6 smd: 1(0,0) 2(0,-1.27) 3(0,-2.54) 4(0,-3.81) 5(5.45,-3.81) 6(5.45,-2.54) 7(5.45,-1.27) 8(5.45,0)
  silkscreen extent -0.13,-4.41 4.33,0.97, body extent 0.72,-4.41 4.72,0.6, height 2.05
SOIC-8 [mm] "TSOP, 8-Leads, Body 4.90x3.90mm, Pitch 1.27mm, IPC Medium Density"
  oval 1.45x0.6 smd: 1(0,0) 2(0,-1.27) 3(0,-2.54) 4(0,-3.81) 5(5.45,-3.81) 6(5.45,-2.54) 7(5.45,-1.27) 8(5.45,0)
  silkscreen extent -0.12,-4.41 4.33,0.97, body extent 0.72,-4.41 4.72,0.6, height 1.1
SOIC-20 [mm]
  rect 2x0.6 smd: 1(0,0) 2(0,-1.27) 3(0,-2.54) 4(0,-3.81) 5(0,-5.08) 6(0,-6.35) 7(0,-7.62) 8(0,-8.89) 9(0,-10.16) 10(0,-11.43) 11(9.3,-11.43) 12(9.3,-10.16) 13(9.3,-8.89) 14(9.3,-7.62) 15(9.3,-6.35) 16(9.3,-5.08) 17(9.3,-3.81) 18(9.3,-2.54) 19(9.3,-1.27) 20(9.3,0)
  silkscreen extent 1.58,-11.7 7.3,1.42
SOT23-3 [mm] "SOT23, 3-Leads, Body 2.90x2.55mm, Pitch 0.95mm, IPC Medium Density"
  rect 1x0.7 smd: 1(0,0) 2(0,-1.9) 3(2.6,-0.95)
  silkscreen extent 0.51,-2.54 2.29,0.89, body extent 0.5,-2.57 2.3,0.53, height 1.45
SOT-23-5 [mm] "5 pin SOT23"
  rect 1.1x0.6 smd mask+0.18: 1(0,0) 2(0,-0.95) 3(0,-1.9)
  rect 1.1x0.6 smd: 4(-2.6,-1.9) 5(-2.6,0)
  silkscreen extent -1.5,-2.2 0.22,1.22
Test_Point#1 [mm]
  round 2 hole 1.2: 1(0,0)
Test_Point#2 [mm]
  round 2 hole 1.2: 1(0.342,-0.178)
Test_Point#3 [mm]
  round 2 hole 1.2: 1(0.189,0.42)
Test_Point#4 [mm]
  round 2 hole 1.2: 1(0.215,-0.425)
Trafo_15x15 [mm]
  rect 1.2x2.5 smd: 1(0,0) 2(3.75,0) 3(7.5,0) 4(11.25,0) 5(11.25,15.2) 6(7.5,15.2) 7(3.75,15.2) 8(0,15.2)
  silkscreen extent -2.53,-0.93 13.1,15.3
VREG [mm]
  round 1.5 hole 0.75: 1(0,0) 2(2.54,0) 3(5.08,0)
  silkscreen extent -3.4,-2.6 8.6,4.4
WAGO-3_pins [mm] "3 pin connector"
  rect 3.2x3.2 hole 1.6: 1(-5.08,0)
  round 3.2 hole 1.6: 2(0,0) 3(5.08,0)
  silkscreen extent -9.18,-10 9.18,2, body extent -9.1,-10 9.1,2, height 8.4
WAGO_2_pins [mm]
  rect 3.2x3.2 hole 1.6: 1(0,0)
  round 3.2 hole 1.6: 2(5,0)
  silkscreen extent -4.08,-10 9.2,2

## Part data
C1 C2 C15 C16 C17 C201 C202 C215 C216 C217: library part 0805CAPxxrrrrv, "CAP CER rrrrUF xV x% type 0805"
C3 C5 C7 C8 C30 C203 C205: library part C-0805_3_3uF
C4 C32 C35 C40 C43: library part C-0805_100nF
C6 C19 C29 C31 C34 C41 C42: library part C-0805_10uF
C11 C13 C211 C213: library part C-0603_0_1u_10V, "CAP CER 0.1UF 10V X7R 0603"
C12 C14 C212 C214: library part C-0603_470p_10V, "CAP CER 470p 10V C0G/NP0 0603"
C20 C21 C22 C23 C24 C25 C26 C27: library part CAP_2200uF_35V, "Capacitor"
C44 C45 C244 C245: library part C-1210
D3 D4 D5 D6 D203 D204 D205 D206: library part ES1x, "Diode"
DAC1_1 DAC1_2 DAC2_1 DAC2_2 TP1 TP5 TP6: library part Test_Point
F1: library part Filter_SBSPP0500683MX
IC1: library part AP2210N-3.3, "AP2210N-3.3TRG1DICT-ND"
IC2 IC202: "IC OPAMP JFET 16MHZ RRO 8-MSOP"
IC8 IC11: library part AP2210N-5, "AP2210N-5.0TRG1DICT-ND"
IC9: "AP2210N-3.3TRG1DICT-ND"
J1 J3 J14: library part "2x1 connector"
J2 J13: library part "3x1 connector"
J7 J8: library part HEADER_2x20_2.54_1
J10: library part CON13
J11: library part HEADER_2x5_2.54, "Conn Unshrouded Header HDR 10 POS 2.54mm Solder ST Thru-Hole"
L1: library part "FIXED IND 330UH 1.15A 580 MOHM"
L2 L3: library part induktor_0806
R1 R2 R5 R8 R9 R10 R14 R16 R17 R19 R20 R23 R201 R202 R205 R208 R209 R210 R214 R223: library part "CRCW0805xxxxJN Default", "RES xx OHM 1/8W 5% 0805 SMD"
R3 R11 R203 R211: library part RES-0805
R4 R12 R204 R212: library part R-0603_470R, "RES SMD 470 OHM 1% 0.4W 0805"
R6 R13 R206 R213: library part R-0603_47k, "RES SMD 47k 1% 0.4W 0805"
R7 R15 R207 R215: library part "CRCW0805xxxxJN Default", "0.1Ohm 10W"
R18 R24: library part CRCW08051K00FKEA, "RES 1 KOHM 1/8W 1% 0805 SMD"
R21 R22 R121 R122: library part "RES SMD 75K OHM 1% 2W 2512"
TR1 TR2: library part TRAFO_15x15

## Via types
v1: diameter 32.01, hole 15, Top Layer to Bottom Layer, 98 vias
v2: diameter 50, hole 28, Top Layer to Bottom Layer, 25 vias
v3: diameter 30, hole 15, Top Layer to Bottom Layer, 2 vias
v4: diameter 78.74, hole 47.25, Top Layer to Bottom Layer, 1 vias

## Nets (pads, with @x,y where several pads share a name; then routed paths per layer and width w, separated by ;. In a path a pad name is that pad's centre, name@x,y a point inside that pad or via, vN(x,y) a via of type N, cw(c..) or ccw(c..) an arc to the next point about the centre after c; other vN are vias at no path point)
5V_FPGA: C42.1 C43.2 IC11.2 TP5.1 | length 377.8
  Top Layer w10: C43.2@2606.53,10172 2606.53,10261.72 IC11.2@2608.8,10264 ; C42.1@2610.43,10076 C43.2@2610.43,10170 ; C43.2@2612.43,10172 2799,10172 TP5.1@2802,10169
17: J8.38
28: IC5.7 IC205.7 J8.28 | length 6319
  Top Layer w10: J8.28@1402,10437 1316,10437 1074,10195 1074,7008 1644,6438 1824,6438 1845,6417 1890,6417 1893.7,6413.3 1942.44,6413.3 2013,6342.74 IC205.7@2013,6326 2013,6302 2098,6217 2371,6217 v1(2388,6200) ; v1(3099,6192) 3142,6192 3211,6261 IC5.7@3211,6331
  Bottom Layer w10: v1(2388,6200) 2388,6247.19 2412.81,6272 2435.19,6272 2538.19,6169 3076,6169 v1(3099,6192)
29: IC5.9 IC205.9 J8.26 | length 6478.9
  Top Layer w6: v1(2999,6247) 3072,6247 3111,6286 IC5.9@3111,6331
  Top Layer w10: J8.26@1402,10537 1315,10537 1025,10247 1025,6986.37 1635,6376.37 1879.37,6376.37 1913,6342.74 IC205.9@1913,6326 1913,6309.26 2065.27,6157 2405.81,6157 2487,6238.19 2487,6333 v1(2475,6345)
  Bottom Layer w6: v1@2992,6240 v1(2999,6247)
  Bottom Layer w10: v1(2475,6345) 2480,6345 2590,6235 2992,6235 v1@2992,6240
30: J8.22
32: IC5.6 IC205.6 J8.27 | length 6321.6
  Top Layer w10: J8.27@1502,10437 1449,10384 1314,10384 1104,10174 1104,7011 1652,6463 1830,6463 1854,6439 1966.74,6439 2063,6342.74 IC205.6@2063,6326 2063,6309.26 2127.26,6245 v1(2424,6245) ; v1(3171,6171) 3261,6261 IC5.6@3261,6331
  Bottom Layer w10: v1(2424,6245) 2522,6147 3147,6147 v1(3171,6171)
33: IC5.8 IC205.8 J8.25 | length 6502.1
  Top Layer w10: J8.25@1502,10537 1451,10486 1302,10486 1052,10236 1052,6982 1620,6414 1808,6414 1826,6396 1909.74,6396 1963,6342.74 IC205.8@1963,6326 1963,6309.26 2099.27,6173 2399.19,6173 2463,6236.81 2463,6287 2460,6290 v1(2460,6292) ; v1(3139,6244) 3163,6268 3163,6329 IC5.8@3161,6331
  Bottom Layer w10: v1(2460,6292) 2542,6210 3041,6210 3075,6244 v1(3139,6244)
38: IC5.11 IC205.11 J8.20 | length 6961.5
  Top Layer w10: J8.20@1402,10837 1280,10837 993,10550 993,6951 1332,6612 1332,6361 1733.14,5959.86 IC205.11@1863,5959.86 1863,5995 v1(2009,6141) ; v1(2714,5986) 2750,5986 2805,5931 3027.14,5931 IC5.11@3061,5964.86
  Bottom Layer w10: v1(2009,6141) 2024,6156 2490.37,6156 2587.37,6059 2641,6059 v1(2714,5986)
39: IC5.13 IC205.13 J8.18 | length 7302.7
  Top Layer w10: J8.18@1402,10937 1271,10937 959,10625 959,6922 1236.69,6644.31 1236.69,6411.06 1754.26,5893.49 1913.37,5893.49 1963,5943.12 IC205.13@1963,5959.86 1963,5976.6 2083.4,6097 2174,6097 v1(2183,6106) ; v1(2724,5892) 2739,5877 3114,5877 3161,5924 IC5.13@3161,5964.86
  Bottom Layer w10: v1(2183,6106) 2397,5892 v1(2724,5892)
41: IC5.10 IC205.10 J8.19 | length 6639.6
  Top Layer w10: J8.19@1502,10837 1448,10783 1269,10783 1009,10523 1009,6979.75 1662.75,6326 IC205.10@1863,6326 1863,6289 1938,6214 v1(1957,6214) ; v1(2569,6358) 3034,6358 IC5.10@3061,6331
  Bottom Layer w10: v1(1957,6214) 2282,6214 2440,6372 2555,6372 v1(2569,6358)
43: IC5.12 IC205.12 J8.17 | length 7306.5
  Top Layer w10: J8.17@1502,10937 1454,10889 1266,10889 975,10598 975,6939 1292,6622 1292,6378.37 1760.88,5909.49 1887.49,5909.49 1913,5935 IC205.12@1913,5959.86 1913,5976.6 2065.4,6129 v1(2101,6129) v1@2111,6119 ; v1(2667,5949) 2743,5949 2792,5900 3081,5900 3111,5930 IC5.12@3111,5964.86
  Bottom Layer w10: v1(2101,6129) 2105,6133 2483,6133 v1(2667,5949)
44: IC205.15 J8.16 | length 6181.8
  Top Layer w10: J8.16@1402,11037 1295.37,11037 927,10668.63 927,6881 1190,6618 1190,6399 1731.5,5857.5 1984.5,5857.5 2063,5936 IC205.15@2063,5959.86 2065.63,5959.86 IC205.15@2065.63,5979.23
45: IC5.16 IC205.16 J8.14 R23.1 R223.1 | length 7874.9
  Top Layer w10: J8.14@1402,11137 1328,11137 892,10701 892,6870 1158,6604 1158,6396.5 1723,5831.5 2074.97,5831.5 R23.1@2082,5838.53 2113,5869.53 IC205.16@2113,5959.86 2113,5976.6 2191.4,6055 2266,6055 v1(2282,6071) ; v1(2536,5966) 2544.19,5966 2677.66,5832.53 R223.1@3285,5832.53 3311,5858.53 IC5.16@3311,5964.86
  Bottom Layer w10: v1(2282,6071) 2439.19,6071 2536,5974.19 v1(2536,5966)
46: IC5.14 IC205.14 J8.15 | length 7593.2
  Top Layer w10: J8.15@1502,11037 1453,10988 1269,10988 943,10662 943,6909 1219,6633 1219,6406.12 1747.63,5877.49 1947.37,5877.49 2013,5943.12 IC205.14@2013,5959.86 2013,5983 2103,6073 2227,6073 2252,6098 2327,6098 v1(2334,6105) ; v1(2591,5970) 2704,5857 3159,5857 3211,5909 IC5.14@3211,5964.86
  Bottom Layer w10: v1(2334,6105) 2444,6105 2579,5970 v1(2591,5970)
47: J8.13 J9.9 | length 752
  Top Layer w12: J8.13@1502,11137 1688,11137 2043,10782 J9.9@2107,10782
48: J8.2
50: J8.12 J9.8 | length 852
  Top Layer w12: J8.12@1402,11237 1450,11189 1741,11189 2048,10882 J9.8@2107,10882
52: J8.10 J9.6 | length 810.6
  Top Layer w12: J8.10@1402,11337 1455,11284 1806,11284 2008,11082 J9.6@2107,11082
55: J8.11 J9.7 | length 710.6
  Top Layer w12: J8.11@1502,11237 1772,11237 2027,10982 J9.7@2107,10982
56: J8.9 J9.5 | length 669.2
  Top Layer w12: J8.9@1502,11337 1804,11337 1959,11182 J9.5@2107,11182
57: J8.8 J9.3 | length 727.8
  Top Layer w12: J8.8@1402,11437 1452,11387 2102,11387 J9.3@2107,11382
58: J8.6 J9.2 | length 729
  Top Layer w12: J8.6@1402,11537 1455,11484 2107,11484 J9.2@2107,11482
59: J8.7
60: J8.5
61: J8.33
80: J7.38
88: J7.5 J10.2 | length 838
  Top Layer w10: J10.2@3476,11484 3954,11484 4048,11578 4210,11578 J7.5@4256,11532
89: J7.7 J10.5 | length 921.4
  Top Layer w10: J10.5@3476,11184 3783,11184 4077,11478 4211,11478 4256,11433 J7.7@4256,11432
90: J7.6 J10.3 | length 741.3
  Top Layer w10: J10.3@3476,11384 3910,11384 4058,11532 J7.6@4156,11532
91: J7.8 J10.6 | length 824.1
  Top Layer w10: J10.6@3476,11084 3769,11084 4117,11432 J7.8@4156,11432
92: J7.9 J10.7 | length 962.3
  Top Layer w10: J10.7@3476,10984 3713,10984 4107,11378 4210,11378 J7.9@4256,11332
93: J7.11 J10.9 | length 1003.7
  Top Layer w10: J10.9@3476,10784 3628,10784 4122,11278 4210,11278 J7.11@4256,11232
96: J7.10 J10.8 | length 865.6
  Top Layer w10: J10.8@3476,10884 3687,10884 4135,11332 J7.10@4156,11332
97: J7.2
98: IC5.15 J7.12 | length 6607.1
  Top Layer w10: IC5.15@3261,5964.86 3261,6010 v1(3386,6135) ; v1(3591,6140) 3624,6140 3863.5,6379.5 3863.5,6689.5 4168,6994 4470.57,6994 4603,7126.43 4603,9628 4481,9750 4167.95,9750 4043,9874.95 4043,11133 4142,11232 J7.12@4156,11232
  Bottom Layer w10: v1(3386,6135) 3391,6140 v1(3591,6140)
99: C4.2 IC6.8 J7.13 R18.2 R24.1 | length 2425.4
  Top Layer w10: J7.13@4256,11132 4637,11132 v1(4807,11302) ; v1(4870.5,11365.5) 5000,11495 ; IC6.8@5201.18,11533.22 5165.22,11533.22 5127,11495 5000,11495 ; R18.2@5549.53,12063 5497.53,12115 5432,12115 5167,11850 4968,11850 4906,11788 4906,11589 5000,11495
  Top Layer w25: C4.2@5546.53,11979 5546.53,12060 R18.2@5549.53,12063 5550.53,12064 R24.1@5645.47,12064
  Bottom Layer w10: v1(4807,11302) v1(4870.5,11365.5)
100: J7.14 J11.3 | length 507.9
  Top Layer w10: J7.14@4156,11132 4191,11132 4205,11118 4205,11112.95 4239.95,11078 4343,11078 J11.3@4552,10869
101: J7.15
102: J7.16 J11.5 | length 504.9
  Top Layer w10: J7.16@4156,11032 4185.95,11032 4231.95,10986 4302,10986 4519,10769 J11.5@4552,10769
105: J7.17
106: J7.19
110: J7.25
111: J7.27
112: J7.22
113: J7.32
114: J7.34
118: J7.26
119: J7.28
123: J7.37
+3V3: C37.1 C38.2 IC9.2 | length 194.4
  Top Layer w19.68: C38.2@3059.43,10636 C38.2@3059.43,10648 C37.1@3059.43,10741 IC9.2@3059.43,10830.37
+5V: C3.2 C5.2 C15.2 C16.2 C34.1 C35.2 C203.2 C205.2 C215.2 C216.2 IC3.5 IC4.5 IC5.17 IC8.2 IC203.5 IC204.5 IC205.17 R23.2 R223.2 | length 4913.9
  Top Layer w10: IC204.5@1981,6694.36 2016.93,6658.43 C203.2@2084,6658.43 ; R23.2@2082,5779.47 2091.47,5770 C216.2@2174.47,5770 2173.47,5771 C215.2@2173.47,5845 2163,5855.47 IC205.17@2163,5959.86 2163,5976.6 2221.4,6035 2302.19,6035 2388.19,6121 2409,6121 2512,6224 2512,6360 2480,6392 2402,6392 2349,6445 v1(2349,6703) 2134.47,6703 C203.2@2084,6652.53 ; IC203.5@2498,6706.36 2559.07,6706.36 ; v1(2573,6730) 2574,6730 2559.07,6715.07 2559.07,6706.36 ; C205.2@2600,6659.53 2702.23,6557.3 2887.83,6557.3 C35.2@2917.53,6587 ; C205.2@2600,6665.43 2559.07,6706.36 ; C34.1@2914.53,6679 2914.53,6745.72 IC8.2@2919.8,6751 3016,6751 v1(3028,6763) ; C34.1@2920.43,6679 2923.43,6676 C35.2@2923.43,6587 ; IC4.5@3167,6730.36 3231,6730.36 ; v1(3192,6781) 3192,6769.36 3231,6730.36 ; C3.2@3258,6714.43 3242.07,6730.36 3231,6730.36 ; R223.2@3285,5773.47 3285.53,5774 C16.2@3376.47,5774 3376.47,5846 C15.2@3371.47,5851 3361,5861.47 IC5.17@3361,5964.86 3361,6028 3573,6240 3573,6335.74 3513.74,6395 3437,6395 3317,6515 3317,6642.45 3281.26,6678.19 3258,6678.19 C3.2@3258,6708.53 3331.53,6708.53 3397,6774 v1(3407,6774) ; v1(3513,6789) 3548,6754 3548,6726.36 ; IC3.5@3515,6726.36 3548,6726.36 ; C5.2@3619,6711.53 3562.83,6711.53 3548,6726.36
  Bottom Layer w10: v1(2349,6703) 2376,6730 v1(2573,6730) ; v1(3028,6763) 3174,6763 v1(3192,6781) ; v1(3407,6774) 3498,6774 v1(3513,6789)